# Altium PCB PCB1.PcbDoc
Units mm, origin at the board's own origin, x right, y up, seen from the top; angles counter-clockwise.
Board outline 152.4 x 101.6 mm, 2 copper layers (Top Layer, Bottom Layer); 31 components, 19 nets, 78 pads, 9 vias.
Unrouted connection lines stored in the file: 2.
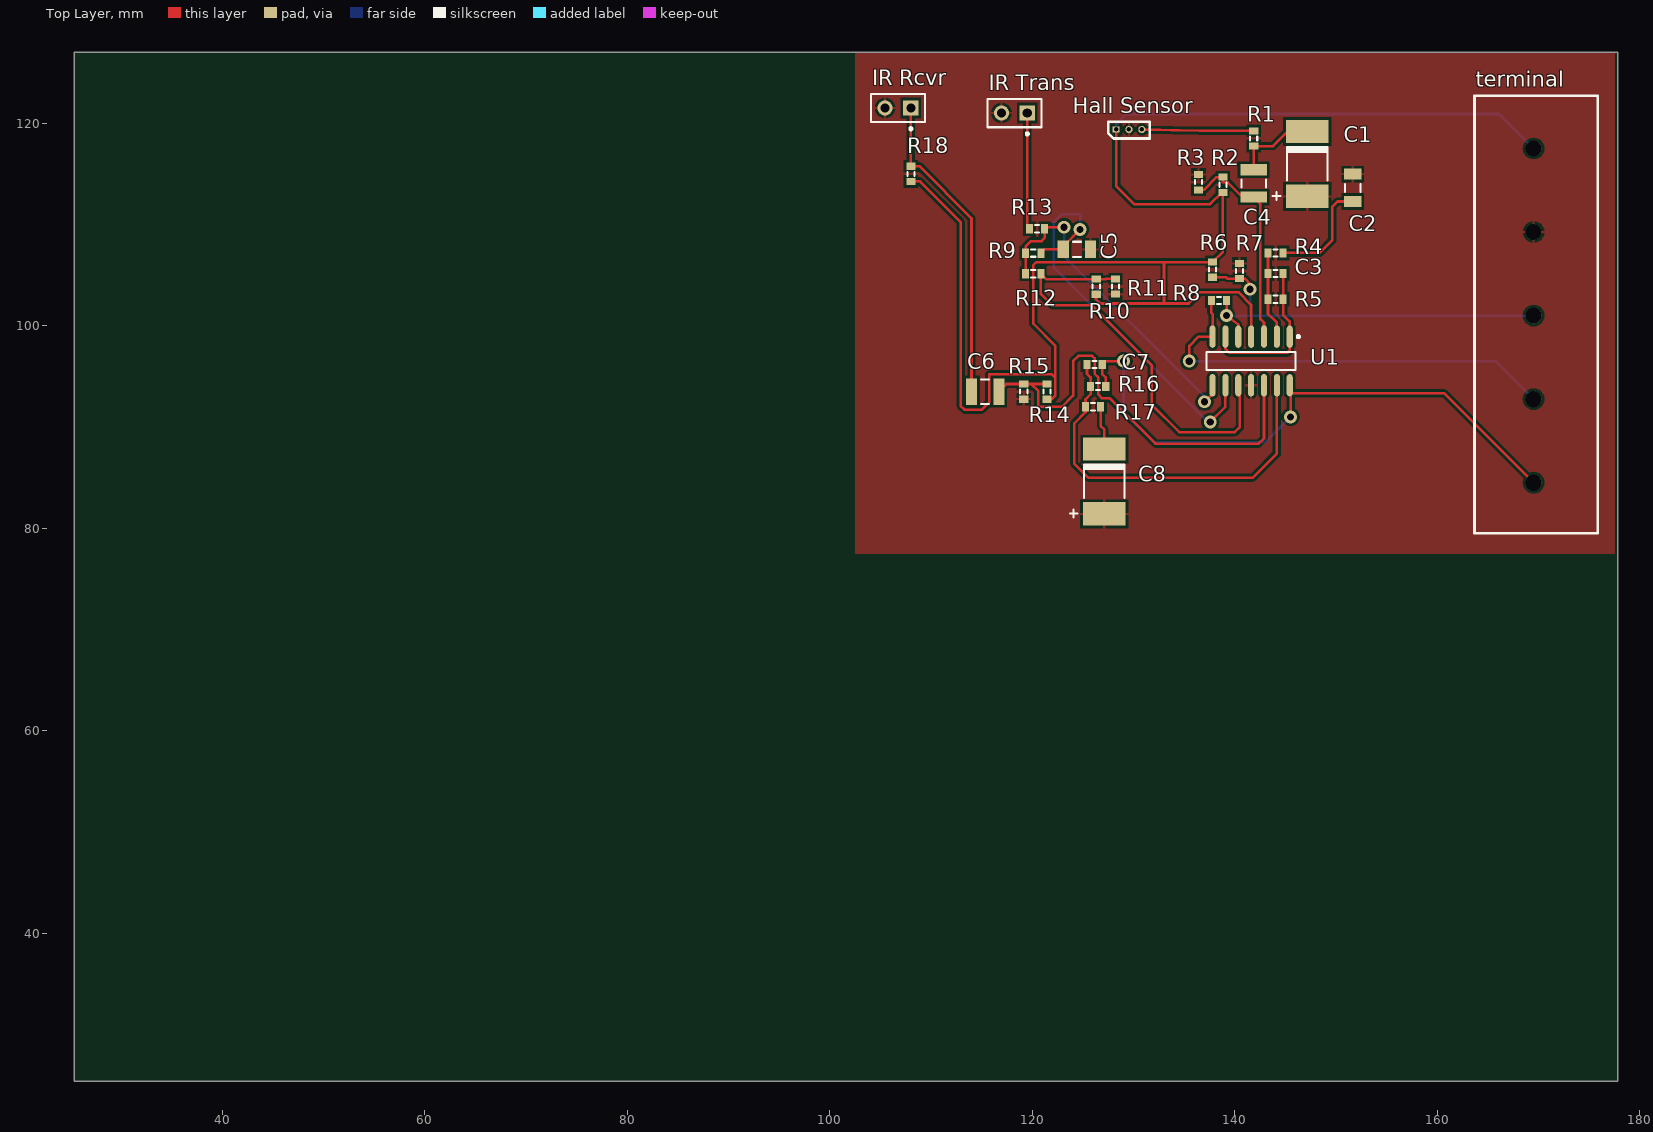
[diagram p0: Top Layer view]
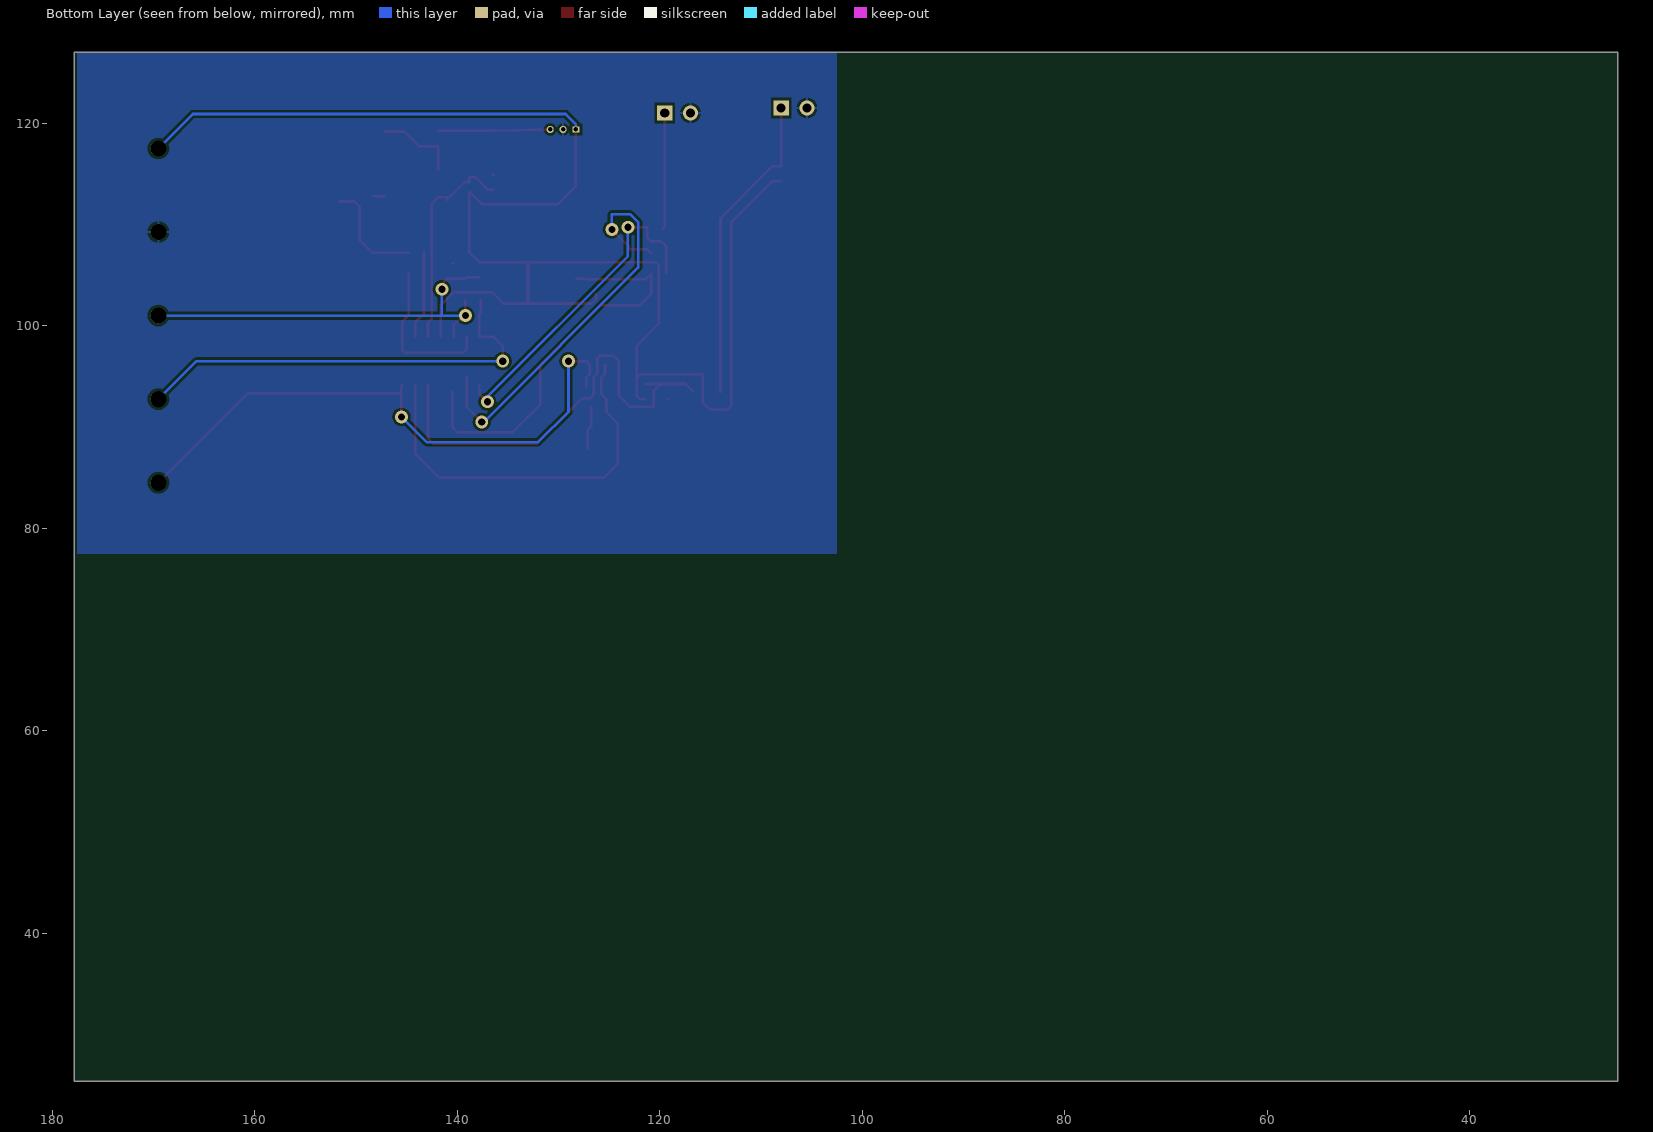
[diagram p1: Bottom Layer view, seen from below]

## Layer stack, top to bottom
Top Solder: solder mask 0.0102, Solder Resist, Dk 3.5
Top Layer: signal copper 0.0356
Dielectric 1: dielectric 0.32, FR-4, Dk 4.8
Bottom Layer: signal copper 0.0356
Bottom Solder: solder mask 0.0102, Solder Resist, Dk 3.5

## Board outline
25.4,25.4 177.8,25.4 177.8,127 25.4,127

## Design rules (kind name [scope] priority, off if disabled: settings)
Clearance [All] p1: gap=0.254 ignorepadtopadclearanceinfootprint=FALSE except(0: Arc-Hole Track-Hole SMDPad-Hole THPad-Hole Via-Hole Fill-Hole Poly-Hole Region-Hole Text-Hole)
PolygonConnect [All] p1: connectstyle=Relief reliefconductorwidth=0.254 reliefentries=4 polygonreliefangle="90 Angle" airgapwidth=0.254
RoutingVias [All] p1: holewidth=0.711 width=1.27 viastyle="Through Hole" minholewidth=0.711 minwidth=1.27 maxholewidth=0.711 maxwidth=1.27
SolderMaskExpansion [All] p1: expansion=0.102
Width [All] p1: maxlimit=0.254 minlimit=0.254 preferedwidth=0.254
30 further rules are at their usual default settings.

## Components (designator, comment, footprint, x,y, rotation, side; value= is the part's Value field where it differs from the comment)
C1 "Cap" 10TPB220M 147.193,115.951 r90 top value=100uF
C2 "Cap Semi" C1206 151.638,113.618 r270 top value=47uF
C3 "Cap" J1-0603 144.018,105.156 r0 top value=470nF
C4 "Cap Semi" C1210 141.859,114.046 r270 top value=33uF
C5 "Cap Semi" C1206 124.405,107.543 r0 top value=47uF
C6 "Cap Semi" C1210 115.343,93.495 r0 top value=33uF
C7 "Cap" J1-0603 126.15,96.162 r0 top value=470nF
C8 "Cap" 10TPB220M 127.154,84.605 r90 top value=220uF
"Hall Sensor" "Component_1" PCBComponent_1#1 128.27,119.38 r0 top
"IR Rcvr" "Diode" PIN2 108,121.5 r180 top
"IR Trans" "LED1" PIN2 119.5,121 r180 top
R1 "Res3" J1-0603 141.859,118.491 r270 top value=3.9K
R2 "Res3" J1-0603 138.811,113.919 r270 top value=20K
R3 "Res3" J1-0603 136.398,114.173 r270 top value=20K
R4 "Res3" J1-0603 144.018,107.188 r180 top value=2.2K
R5 "Res3" J1-0603 144.018,102.616 r0 top value=50K
R6 "Res3" J1-0603 137.795,105.537 r90 top value=1K
R7 "Res3" J1-0603 140.462,105.41 r270 top value=1K
R8 "Res3" J1-0603 138.43,102.489 r180 top value=1K
R9 "Res3" J1-0603 120.087,107.162 r0 top value=1K
R10 "Res3" J1-0603 126.31,103.86 r270 top value=1K
R11 "Res3" J1-0603 128.215,103.872 r90 top value=1K
R12 "Res3" J1-0603 120.087,105.13 r0 top value=1K
R13 "Res3" J1-0603 120.468,109.575 r0 top value=100
R14 "Res3" J1-0603 121.439,93.495 r270 top value=40K
R15 "Res3" J1-0603 119.153,93.495 r90 top value=20K
R16 "Res3" J1-0603 126.5,94 r0 top value=200K
R17 "Res3" J1-0603 126,92 r180 top value=1K
R18 "Res3" J1-0603 108,115 r90 top value=100K
terminal "Component_1" PCBComponent_1#2 169.5,117.5 r270 top
U1 "LM324AD" 751A-03_N 141.605,96.52 r270 top

## Footprints (in the part's own frame and the unit in brackets; to place one, negate y for a bottom-side part, rotate by r counter-clockwise, add the part's x,y. Pads: shape width x height; smd on the part's side, far side on the other; paste and mask are expansions set on the pad)
10TPB220M [mm]
  rect 2.3x4.2 smd: 1(-3.175,0.051) 2(3.225,0.051)
  silkscreen extent -3.53,-1.95 1.68,3.45, body extent -3.65,-2.1 3.65,2.2, height 4
751A-03_N [mm] "SOIC, 14-Leads, Body 8.7x3.9mm, Pitch 1.27mm, IPC Medium Density"
  oval 2.2x0.6 smd: 1(-2.4,3.81) 2(-2.4,2.54) 3(-2.4,1.27) 4(-2.4,0) 5(-2.4,-1.27) 6(-2.4,-2.54) 7(-2.4,-3.81) 8(2.4,-3.81) 9(2.4,-2.54) 10(2.4,-1.27) 11(2.4,0) 12(2.4,1.27) 13(2.4,2.54) 14(2.4,3.81)
  silkscreen extent -2.52,-4.4 0.9,4.79, body extent -1.95,-4.33 1.95,4.33, height 1.75
C1206 [mm] "Chip Capacitor, Body 3.2x1.6mm, IPC High Density"
  rect 1.1x1.7 smd: 1(-1.35,0) 2(1.35,0)
  silkscreen extent -0.4,-0.75 0.4,0.75, body extent -1.7,-0.9 1.7,0.9, height 1.3
C1210 [mm] "Chip Capacitor, Body 3.2x2.5mm, IPC High Density"
  rect 1.1x2.6 smd: 1(-1.35,0) 2(1.35,0)
  silkscreen extent -0.4,-1.2 0.4,1.2, body extent -1.7,-1.35 1.7,1.35, height 1.3
J1-0603 [mm] "Chip Resistor, Body 1.6x0.8mm, IPC High Density"
  rect 0.7x0.9 smd: 1(-0.75,0) 2(0.75,0)
  silkscreen extent -0.2,-0.35 0.2,0.35, body extent -0.85,-0.48 0.85,0.48, height 0.9
PCBComponent_1#1 [mm]
  rect 0.7x0.6 hole 0.44: 1(0,0)
  round 0.7 hole 0.44: 2(1.27,0) 3(2.54,0)
  silkscreen extent -0.76,-0.89 3.3,0.76
PCBComponent_1#2 [mm]
  round 1.524 hole 1.6: 1(0,0) 2(8.25,0) 3(16.5,0) 4(24.75,0) 5(33,0)
  silkscreen extent -5.21,-5.84 37.97,6.35
PIN2 [mm] "Photosensitive Diode; 2 Leads"
  rect 1.5x1.5 hole 0.9: 1(0,0)
  round 1.5 hole 0.9: 2(2.54,0)
  silkscreen extent -1.4,-1.4 3.94,2.17

## Part data
C1 C3 C7 C8: "Capacitor", LatestRevisionDate=17-Jul-2002, LatestRevisionNote="Re-released for DXP Platform.", PackageDescription="Radial Cap, Thru-Hole; 2 Leads; 0.3 in Pin Spacing", PackageReference=RAD-0.3, Published=8-Jun-2000, Publisher="Altium Limited"
C2 C4 C5 C6: "Capacitor (Semiconductor SIM Model)", LatestRevisionDate=29-May-2009, LatestRevisionNote="IPC-7351 Footprint Added.", PackageDescription="Chip Capacitor", PackageReference=C1206, Published=8-Jun-2000, Publisher="Altium Limited"
"IR Rcvr": "Default Diode", Code_JEDEC=DO-214-AB, LatestRevisionDate=17-Jul-2002, LatestRevisionNote="Re-released for DXP Platform.", PackageDescription="DO-214-AB/SMC; 2 C-Bend Leads; Body 7.9 x 5.9 mm, inc. leads (LxW)", PackageReference=SMC, PackageVersion=Sep-1996, Published=8-Jun-2000, Publisher="Altium Limited"
"IR Trans": "Typical RED GaAs LED", LatestRevisionDate=08-Jul-2005, LatestRevisionNote="Mech Layer 1 removed.", PackageDescription="LED; 2 Leads", PackageReference=LED-1, Published=8-Jun-2000, Publisher="Altium Limited"
R1 R2 R3 R4 R5 R6 R7 R8 R9 R10 R11 R12 R13 R14 R15 R16 R17 R18: "Resistor", LatestRevisionDate=29-May-2009, LatestRevisionNote="IPC-7351 Footprint Added.", PackageDescription="Chip Resistor", PackageReference=J1-0603, Published=8-Jun-2000, Publisher="Altium Limited"
U1: "Quad Differential Input, Low-Power Operational Amplifier", Code_IPC=SOIC127P600-14, Code_JEDEC=MS-012-AB, ComponentLink1Description="Manufacturer Link", ComponentLink1URL=http://www.onsemi.com/, ComponentLink2Description=Datasheet, ComponentLink2URL=http://www.onsemi.com/pub/Collateral/LM324-D.PDF, DatasheetVersion="Dec-2001, Rev. 7", LatestRevisionDate=13-Apr-2006, LatestRevisionNote="IPC-7351 Footprint Added.", PackageDescription="14-Pin Small Outline Integrated Circuit 1.27 mm Pitch", PackageReference=751A-03, Published=28-Feb-2003, Publisher="Altium Limited"

## Via types
v1: diameter 1.27, hole 0.711, Top Layer to Bottom Layer, 9 vias

## Nets (pads, with @x,y where several pads share a name; then routed paths per layer and width w, separated by ;. In a path a pad name is that pad's centre, name@x,y a point inside that pad or via, vN(x,y) a via of type N, cw(c..) or ccw(c..) an arc to the next point about the centre after c; other vN are vias at no path point)
GND: "Hall Sensor.2" "IR Rcvr.2" "IR Trans.2" C1.1 C2.1 C5.2 C8.1 R3.1 R7.1 R11.1 R15.1 terminal.2 U1.11 | length 1.3
  Top Layer w0.254: R15.1@119.151,92.745 R15.1 ; R3.1 R3.1@136.474,114.923 ; R7.1@140.36,106.16 R7.1 ; C1.1 C1.1@148.285,112.776
HALL: "Hall Sensor.3" R1.1 | length 11.1
  Top Layer w0.254: 130.81,119.38 136.461,119.241 R1.1
HALL_OUT: R8.2 terminal.4 U1.7 | length 43.3
  Top Layer w0.254: v1(135.5,96.5) 135.5,98 136.42,98.92 U1.7 137.795,101.15 137.68,101.265 R8.2
  Bottom Layer w0.254: v1(135.5,96.5) 165.75,96.5 terminal.4
IR_OUT: C7.2 R16.2 terminal.5 U1.14 | length 59.1
  Top Layer w0.254: R16.2 127.25,94.894 126.9,95.244 C7.2 127.238,96.5 v1(129,96.5) ; U1.14 145.5,94.035 U1.14@145.5,93.32 ; v1(145.5,91) U1.14@145.5,93.32 ; terminal.5 160.68,93.32 U1.14@145.5,93.32
  Bottom Layer w0.254: v1(129,96.5) 129,91.5 132,88.5 143,88.5 v1(145.5,91)
IR_RECEIVER: "IR Rcvr.1" C6.1 R18.2 | length 31
  Top Layer w0.254: 108,121.5 R18.2 108.839,115.75 113.993,110.596 C6.1
IR_TRANS: "IR Trans.1" R13.1 | length 11.5
  Top Layer w0.254: 119.5,121 119.5,109.793 R13.1
MICRO_IN: R6.1 R7.2 R8.1 terminal.3 U1.5 | length 41.6
  Top Layer w0.254: R6.1 139.123,104.787 139.25,104.66 R7.2 140.983,104.66 141.503,104.14 v1(141.503,103.607) ; R8.1 v1(139.18,101) 140.335,100.127 U1.5
  Bottom Layer w0.254: v1(139.18,101) 141.5,101 ; v1(141.503,103.607) 141.503,101.003 141.5,101 ; terminal.3 141.5,101
NetC1_2: C1.2 C4.1 R1.2 | length 8.2
  Top Layer w0.254: C4.1 R1.2 143.764,117.741 145.199,119.176 C1.2
NetC2_2: C2.2 R4.1 | length 10.9
  Top Layer w0.254: R4.1 148.336,107.188 149.631,108.483 149.631,111.76 150.139,112.268 C2.2
NetC3_1: C3.1 R4.2 R5.1 U1.2 | length 8.6
  Top Layer w0.254: R4.2 C3.1 R5.1 143.268,101.182 144.145,100.305 U1.2
NetC3_2: C3.2 R5.2 U1.1 U1.6 | length 15.7
  Top Layer w0.254: U1.6 139.065,97.714 139.446,97.333 145.212,97.333 145.415,97.536 U1.1 145.415,100.432 144.768,101.079 R5.2 C3.2
NetC4_2: C4.2 R2.1 R3.2 U1.3 | length 21.7
  Top Layer w0.254: R3.2 136.957,113.423 138.203,114.669 R2.1 138.811,114.148 139.294,114.148 141,112.441 141,112.696 C4.2 142.519,112.036 142.519,100.66 142.875,100.305 U1.3
NetC5_1: C5.1 R9.2 U1.9 | length 40.8
  Top Layer w0.254: R9.2 121.218,107.543 C5.1 123.055,107.848 v1(124.714,109.507) ; v1(137.563,90.5) 139.065,92.002 U1.9 U1.9@139.065,95.017
  Bottom Layer w0.254: v1(124.714,109.507) 124.714,111 122.887,111 122.123,110.236 122.123,105.74 137.363,90.5 v1(137.563,90.5)
NetC6_2: C6.2 R14.1 R15.2 U1.12 | length 44.9
  Top Layer w0.254: C6.2 117.443,94.245 R15.2 119.888,94.245 ; R14.1 119.888,94.245 ; U1.12 142.875,88.875 142.35,88.35 132.15,88.35 127.663,92.837 126.898,92.837 126.517,93.218 126.517,94.894 126.162,95.25 126.162,96.774 125.908,97.028 124.536,97.028 124.028,96.52 124.028,93.091 122.936,91.999 120.599,91.999 120.599,93.534 119.888,94.245
NetC7_1: C7.1 R16.1 R17.2 U1.13 | length 38.9
  Top Layer w0.254: C7.1 125.4,95.244 125.75,94.894 R16.1 125.75,93.235 125.25,92.735 R17.2 125.25,91.465 124.155,90.371 124.155,86.36 125.515,85 141.769,85 144.145,87.376 U1.13
NetC8_2: C8.2 R17.1 | length 4.3
  Top Layer w0.254: R17.1 126.75,90.091 127.103,89.738 C8.2
NetR9_1: R9.1 R12.1 R13.2 U1.8 | length 32.8
  Top Layer w0.254: R12.1 R9.1 119.337,107.805 119.888,108.356 120.904,108.356 121.218,108.67 R13.2 121.218,109.728 v1(123.139,109.728) ; v1(137,92.5) 137.052,92.5 137.795,93.243 U1.8
  Bottom Layer w0.254: v1(123.139,109.728) 123.139,106.861 137,93 v1(137,92.5)
NetR10_1: R10.1 R11.2 R12.2 U1.10 | length 40.9
  Top Layer w0.254: R11.2 127.266,104.622 127.254,104.61 R10.1 121.357,104.61 R12.2 120.837,103.115 121.92,102.032 125.857,102.032 131.775,96.114 131.775,92.225 134.516,89.484 139.984,89.484 140.5,90 U1.10@140.5,93.5
VCC: "Hall Sensor.1" R2.2 R6.2 R10.2 R14.2 R18.1 terminal.1 U1.4 | length 162.5
  Top Layer w0.254: R18.1 108.915,114.25 112.928,110.237 112.928,92.075 113.284,91.719 115.011,91.719 115.748,92.456 115.748,95.199 121.92,95.199 122.276,94.844 ; R14.2 121.92,92.745 122.276,93.101 122.276,94.844 ; R10.2 126.289,103.11 126.289,102.616 126.712,102.192 133,102.192 ; 128.27,119.38 128.27,113.792 130.048,112.014 137.554,112.014 138.709,113.169 R2.2 138.811,107.303 R6.2 133,106.287 ; U1.4 141.605,102.057 140.335,103.327 136.576,103.327 135.441,102.192 133,102.192 ; 122.276,94.844 122.276,98.019 120.091,100.203 120.091,105.982 120.396,106.287 133,106.287 ; 133,102.192 133,106.287
  Bottom Layer w0.254: 128.27,119.38 128.27,119.888 129.286,120.904 166.096,120.904 terminal.1

## Polygon pours and split planes (outlines as drawn)
GND on Top Layer "Top Layer-No Net" (solid, pour order 6): 177.5,127 102.5,127 102.5,77.5 177.5,77.5
GND on Bottom Layer "Top Layer-No Net" (solid, pour order 8): 177.5,127 102.5,127 102.5,77.5 177.5,77.5